# EAGLE board testbed top (EAGLE 6.4)

Size 59.05 x 44.45 mm. Coordinates in mm from the lower left corner, seen from the top.
Outline: 2.92,7.6 arc90 4.17,6.1 51.93,6.1 arc90 53.43,7.6 53.43,16.51 58.55,16.51 arc-90 59.05,16.01 59.05,2 arc-90 57.05,0 0.5,0 arc-90 0,0.5 0,17.78 0,43.95 arc-90 0.5,44.45 57.05,44.45 arc-90 59.05,42.45 59.05,27.17 arc-90 58.55,26.67 53.43,26.67 53.43,36.1 arc90 51.93,37.6 4.42,37.6 arc90 2.92,36.1 2.92,21.62 2.92,7.6
Copper layers (1*16): Top 0.035mm / dielectric 1.5mm / Bottom 0.035mm
Design rules "Fusion_eagle_rule_v1.1": minimum track width 6mil, minimum drill 12mil, track to track 6mil, track to pad 6mil, pad to pad 6mil, via to via 6mil, smd to smd 0mil, copper to edge 10mil, drill to drill 10mil, minimum pad ring 10mil, minimum via ring 6mil, stop-mask expansion 2mil, vias tented up to drill 100mil, thermal gap 10mil

## Footprints (pad centres in the part's own frame; a part is rotated, then mirrored left to right if it is on the bottom)
STAND-OFF = hole 3.302: 0,0

## Placement (x,y rotation side)
U$1  [STAND-OFF]  6.35,41.27 0 top
U$4  [STAND-OFF]  6.35,3.17 0 top
U$14  [STAND-OFF]  49.53,41.27 0 top
U$15  [STAND-OFF]  49.53,3.17 0 top

## Library data of the parts
U$1 U$4 U$14 U$15 = SparkFun-Electromechanical